# EAGLE board DemoBoard (EAGLE 9.6.2)

Size 166.04 x 80 mm. Coordinates in mm from the lower left corner, seen from the top.
Outline: 0,0 166.04,0 166.04,80 0,80 0,0
Copper layers (1*16): Top 0.035mm / dielectric 1.5mm / Bottom 0.035mm
Design rules "default": minimum track width 6mil, minimum drill 0.35mm, track to track 6mil, track to pad 6mil, pad to pad 6mil, via to via 6mil, smd to smd 6mil, copper to edge 40mil, drill to drill 6mil, minimum pad ring 10mil, minimum via ring 8mil, stop-mask expansion 4mil, vias tented up to drill 0mil, thermal gap 10mil

## Footprints (pad centres in the part's own frame; a part is rotated, then mirrored left to right if it is on the bottom)
C0805 = smd 1.3 x 1.5: 1 -0.85,0; 2 0.85,0
LED_IN-P55TATRGB = smd 2 x 1.4: 1 -2.2,1.8; 3 -2.2,-1.8; 4 2.2,-1.8; 6 2.2,1.8 | smd 2 x 1: 2 -2.2,0; 5 2.2,0
16026-16X2 = drill 3 pad 6: MNT1 2.5,-2.5; MNT2 77.5,-2.4; MNT3 2.5,-33.5; MNT4 77.5,-33.5 | drill 1 offset: P$1 8,-2.3; P$2 10.54,-2.3; P$3 13.08,-2.3; P$4 15.62,-2.3; P$5 18.16,-2.3; P$6 20.7,-2.3; P$7 23.24,-2.3; P$8 25.78,-2.3; P$9 28.32,-2.3; P$10 30.86,-2.3; P$11 33.4,-2.3; P$12 35.94,-2.3; P$13 38.48,-2.3; P$14 41.02,-2.3; P$15 43.56,-2.3; P$16 46.1,-2.3
SAMTEC-MMS-105-02-X-SV = smd 1.016 x 2.085: 1 -4,-1.677; 2 -2,1.677; 3 0,-1.677; 4 2,1.677; 5 4,-1.677
FRAMATOME_10104111-0001LF = smd 0.4 x 1.4: 1 -1.3,2.85; 2 -0.65,2.85; 3 0,2.85; 4 0.65,2.85; 5 1.3,2.85 | smd 2.3 x 1.9: 6 -3.75,0; 9 3.75,0 | smd 1.8 x 1.9: 7 -1.15,0; 8 1.15,0
0204V = drill 0.813 octagon: 1 -1.27,0; 2 1.27,0
R0805 = smd 1.3 x 1.5: 1 -0.95,0; 2 0.95,0
SW_1571983-4 = smd 0.76 x 1.27: 1 -1.905,-3.81; 1-1 -1.905,3.81; 2 -0.635,-3.81; 2-1 -0.635,3.81; 3 0.635,-3.81; 3-1 0.635,3.81; 4 1.905,-3.81; 4-1 1.905,3.81
BGA8C50P2X4_190X90X50 = smd 0.229 x 0.229: A1 -0.254,0.762; A2 0.254,0.762; B1 -0.254,0.254; B2 0.254,0.254; C1 -0.254,-0.254; C2 0.254,-0.254; D1 -0.254,-0.762; D2 0.254,-0.762
QFP50P2200X2200X160-144N = smd 1.56 x 0.28: 1 -10.68,8.75; 2 -10.68,8.25; 3 -10.68,7.75; 4 -10.68,7.25; 5 -10.68,6.75; 6 -10.68,6.25; 7 -10.68,5.75; 8 -10.68,5.25; 9 -10.68,4.75; 10 -10.68,4.25; 11 -10.68,3.75; 12 -10.68,3.25; 13 -10.68,2.75; 14 -10.68,2.25; 15 -10.68,1.75; 16 -10.68,1.25; 17 -10.68,0.75; 18 -10.68,0.25; 19 -10.68,-0.25; 20 -10.68,-0.75; 21 -10.68,-1.25; 22 -10.68,-1.75; 23 -10.68,-2.25; 24 -10.68,-2.75; 25 -10.68,-3.25; 26 -10.68,-3.75; 27 -10.68,-4.25; 28 -10.68,-4.75; 29 -10.68,-5.25; 30 -10.68,-5.75; 31 -10.68,-6.25; 32 -10.68,-6.75; 33 -10.68,-7.25; 34 -10.68,-7.75; 35 -10.68,-8.25; 36 -10.68,-8.75; 73 10.68,-8.75; 74 10.68,-8.25; 75 10.68,-7.75; 76 10.68,-7.25; 77 10.68,-6.75; 78 10.68,-6.25; 79 10.68,-5.75; 80 10.68,-5.25; 81 10.68,-4.75; 82 10.68,-4.25; 83 10.68,-3.75; 84 10.68,-3.25; 85 10.68,-2.75; 86 10.68,-2.25; 87 10.68,-1.75; 88 10.68,-1.25; 89 10.68,-0.75; 90 10.68,-0.25; 91 10.68,0.25; 92 10.68,0.75; 93 10.68,1.25; 94 10.68,1.75; 95 10.68,2.25; 96 10.68,2.75; 97 10.68,3.25; 98 10.68,3.75; 99 10.68,4.25; 100 10.68,4.75; 101 10.68,5.25; 102 10.68,5.75; 103 10.68,6.25; 104 10.68,6.75; 105 10.68,7.25; 106 10.68,7.75; 107 10.68,8.25; 108 10.68,8.75 | smd 0.28 x 1.56: 37 -8.75,-10.68; 38 -8.25,-10.68; 39 -7.75,-10.68; 40 -7.25,-10.68; 41 -6.75,-10.68; 42 -6.25,-10.68; 43 -5.75,-10.68; 44 -5.25,-10.68; 45 -4.75,-10.68; 46 -4.25,-10.68; 47 -3.75,-10.68; 48 -3.25,-10.68; 49 -2.75,-10.68; 50 -2.25,-10.68; 51 -1.75,-10.68; 52 -1.25,-10.68; 53 -0.75,-10.68; 54 -0.25,-10.68; 55 0.25,-10.68; 56 0.75,-10.68; 57 1.25,-10.68; 58 1.75,-10.68; 59 2.25,-10.68; 60 2.75,-10.68; 61 3.25,-10.68; 62 3.75,-10.68; 63 4.25,-10.68; 64 4.75,-10.68; 65 5.25,-10.68; 66 5.75,-10.68; 67 6.25,-10.68; 68 6.75,-10.68; 69 7.25,-10.68; 70 7.75,-10.68; 71 8.25,-10.68; 72 8.75,-10.68; 109 8.75,10.68; 110 8.25,10.68; 111 7.75,10.68; 112 7.25,10.68; 113 6.75,10.68; 114 6.25,10.68; 115 5.75,10.68; 116 5.25,10.68; 117 4.75,10.68; 118 4.25,10.68; 119 3.75,10.68; 120 3.25,10.68; 121 2.75,10.68; 122 2.25,10.68; 123 1.75,10.68; 124 1.25,10.68; 125 0.75,10.68; 126 0.25,10.68; 127 -0.25,10.68; 128 -0.75,10.68; 129 -1.25,10.68; 130 -1.75,10.68; 131 -2.25,10.68; 132 -2.75,10.68; 133 -3.25,10.68; 134 -3.75,10.68; 135 -4.25,10.68; 136 -4.75,10.68; 137 -5.25,10.68; 138 -5.75,10.68; 139 -6.25,10.68; 140 -6.75,10.68; 141 -7.25,10.68; 142 -7.75,10.68; 143 -8.25,10.68; 144 -8.75,10.68
SOP65P640X120-17T330L = smd 1.272 x 0.582: 1 -2.822,2.275; 2 -2.822,1.625; 3 -2.822,0.975; 4 -2.822,0.325; 5 -2.822,-0.325; 6 -2.822,-0.975; 7 -2.822,-1.625; 8 -2.822,-2.275; 9 2.822,-2.275; 10 2.822,-1.625; 11 2.822,-0.975; 12 2.822,-0.325; 13 2.822,0.325; 14 2.822,0.975; 15 2.822,1.625; 16 2.822,2.275 | smd 3.3 x 3.3: 17 0,0
BGA484C100P22X22_2400X2400X220N = smd 0.5 x 0.5: A1 -10.5,10.5; A2 -9.5,10.5; A3 -8.5,10.5; A4 -7.5,10.5; A5 -6.5,10.5; A6 -5.5,10.5; A7 -4.5,10.5; A8 -3.5,10.5; A9 -2.5,10.5; A10 -1.5,10.5; A11 -0.5,10.5; A12 0.5,10.5; A13 1.5,10.5; A14 2.5,10.5; A15 3.5,10.5; A16 4.5,10.5; A17 5.5,10.5; A18 6.5,10.5; A19 7.5,10.5; A20 8.5,10.5; A21 9.5,10.5; A22 10.5,10.5; AA1 -10.5,-9.5; AA2 -9.5,-9.5; AA3 -8.5,-9.5; AA4 -7.5,-9.5; AA5 -6.5,-9.5; AA6 -5.5,-9.5; AA7 -4.5,-9.5; AA8 -3.5,-9.5; AA9 -2.5,-9.5; AA10 -1.5,-9.5; AA11 -0.5,-9.5; AA12 0.5,-9.5; AA13 1.5,-9.5; AA14 2.5,-9.5; AA15 3.5,-9.5; AA16 4.5,-9.5; AA17 5.5,-9.5; AA18 6.5,-9.5; AA19 7.5,-9.5; AA20 8.5,-9.5; AA21 9.5,-9.5; AA22 10.5,-9.5; AB1 -10.5,-10.5; AB2 -9.5,-10.5; AB3 -8.5,-10.5; AB4 -7.5,-10.5; AB5 -6.5,-10.5; AB6 -5.5,-10.5; AB7 -4.5,-10.5; AB8 -3.5,-10.5; AB9 -2.5,-10.5; AB10 -1.5,-10.5; AB11 -0.5,-10.5; AB12 0.5,-10.5; AB13 1.5,-10.5; AB14 2.5,-10.5; AB15 3.5,-10.5; AB16 4.5,-10.5; AB17 5.5,-10.5; AB18 6.5,-10.5; AB19 7.5,-10.5; AB20 8.5,-10.5; AB21 9.5,-10.5; AB22 10.5,-10.5; B1 -10.5,9.5; B2 -9.5,9.5; B3 -8.5,9.5; B4 -7.5,9.5; B5 -6.5,9.5; B6 -5.5,9.5; B7 -4.5,9.5; B8 -3.5,9.5; B9 -2.5,9.5; B10 -1.5,9.5; B11 -0.5,9.5; B12 0.5,9.5; B13 1.5,9.5; B14 2.5,9.5; B15 3.5,9.5; B16 4.5,9.5; B17 5.5,9.5; B18 6.5,9.5; B19 7.5,9.5; B20 8.5,9.5; B21 9.5,9.5; B22 10.5,9.5; C1 -10.5,8.5; C2 -9.5,8.5; C3 -8.5,8.5; C4 -7.5,8.5; C5 -6.5,8.5; C6 -5.5,8.5; C7 -4.5,8.5; C8 -3.5,8.5; C9 -2.5,8.5; C10 -1.5,8.5; C11 -0.5,8.5; C12 0.5,8.5; C13 1.5,8.5; C14 2.5,8.5; C15 3.5,8.5; C16 4.5,8.5; C17 5.5,8.5; C18 6.5,8.5; C19 7.5,8.5; C20 8.5,8.5; C21 9.5,8.5; C22 10.5,8.5; D1 -10.5,7.5; D2 -9.5,7.5; D3 -8.5,7.5; D4 -7.5,7.5; D5 -6.5,7.5; D6 -5.5,7.5; D7 -4.5,7.5; D8 -3.5,7.5; D9 -2.5,7.5; D10 -1.5,7.5; D11 -0.5,7.5; D12 0.5,7.5; D13 1.5,7.5; D14 2.5,7.5; D15 3.5,7.5; D16 4.5,7.5; D17 5.5,7.5; D18 6.5,7.5; D19 7.5,7.5; D20 8.5,7.5; D21 9.5,7.5; D22 10.5,7.5; E1 -10.5,6.5; E2 -9.5,6.5; E3 -8.5,6.5; E4 -7.5,6.5; E5 -6.5,6.5; E6 -5.5,6.5; E7 -4.5,6.5; E8 -3.5,6.5; E9 -2.5,6.5; E10 -1.5,6.5; E11 -0.5,6.5; E12 0.5,6.5; E13 1.5,6.5; E14 2.5,6.5; E15 3.5,6.5; E16 4.5,6.5; E17 5.5,6.5; E18 6.5,6.5; E19 7.5,6.5; E20 8.5,6.5; E21 9.5,6.5; E22 10.5,6.5; F1 -10.5,5.5; F2 -9.5,5.5; F3 -8.5,5.5; F4 -7.5,5.5; F5 -6.5,5.5; F6 -5.5,5.5; F7 -4.5,5.5; F8 -3.5,5.5; F9 -2.5,5.5; F10 -1.5,5.5; F11 -0.5,5.5; F12 0.5,5.5; F13 1.5,5.5; F14 2.5,5.5; F15 3.5,5.5; F16 4.5,5.5; F17 5.5,5.5; F18 6.5,5.5; F19 7.5,5.5; F20 8.5,5.5; F21 9.5,5.5; F22 10.5,5.5; G1 -10.5,4.5; G2 -9.5,4.5; G3 -8.5,4.5; G4 -7.5,4.5; G5 -6.5,4.5; G6 -5.5,4.5; G7 -4.5,4.5; G8 -3.5,4.5; G9 -2.5,4.5; G10 -1.5,4.5; G11 -0.5,4.5; G12 0.5,4.5; G13 1.5,4.5; G14 2.5,4.5; G15 3.5,4.5; G16 4.5,4.5; G17 5.5,4.5; G18 6.5,4.5; G19 7.5,4.5; G20 8.5,4.5; G21 9.5,4.5; G22 10.5,4.5; H1 -10.5,3.5; H2 -9.5,3.5; H3 -8.5,3.5; H4 -7.5,3.5; H5 -6.5,3.5; H6 -5.5,3.5; H7 -4.5,3.5; H8 -3.5,3.5; H9 -2.5,3.5; H10 -1.5,3.5; H11 -0.5,3.5; H12 0.5,3.5; H13 1.5,3.5; H14 2.5,3.5; H15 3.5,3.5; H16 4.5,3.5; H17 5.5,3.5; H18 6.5,3.5; H19 7.5,3.5; H20 8.5,3.5; H21 9.5,3.5; H22 10.5,3.5; J1 -10.5,2.5; J2 -9.5,2.5; J3 -8.5,2.5; J4 -7.5,2.5; J5 -6.5,2.5; J6 -5.5,2.5; J7 -4.5,2.5; J8 -3.5,2.5; J9 -2.5,2.5; J10 -1.5,2.5; J11 -0.5,2.5; J12 0.5,2.5; J13 1.5,2.5; J14 2.5,2.5; J15 3.5,2.5; J16 4.5,2.5; J17 5.5,2.5; J18 6.5,2.5; J19 7.5,2.5; J20 8.5,2.5; J21 9.5,2.5; J22 10.5,2.5; K1 -10.5,1.5; K2 -9.5,1.5; K3 -8.5,1.5; K4 -7.5,1.5; K5 -6.5,1.5; K6 -5.5,1.5; K7 -4.5,1.5; K8 -3.5,1.5; K9 -2.5,1.5; K10 -1.5,1.5; K11 -0.5,1.5; K12 0.5,1.5; K13 1.5,1.5; K14 2.5,1.5; K15 3.5,1.5; K16 4.5,1.5; K17 5.5,1.5; K18 6.5,1.5; K19 7.5,1.5; K20 8.5,1.5; K21 9.5,1.5; K22 10.5,1.5; L1 -10.5,0.5; L2 -9.5,0.5; L3 -8.5,0.5; L4 -7.5,0.5; L5 -6.5,0.5; L6 -5.5,0.5; L7 -4.5,0.5; L8 -3.5,0.5; L9 -2.5,0.5; L10 -1.5,0.5; L11 -0.5,0.5; L12 0.5,0.5; L13 1.5,0.5; L14 2.5,0.5; L15 3.5,0.5; L16 4.5,0.5; L17 5.5,0.5; L18 6.5,0.5; L19 7.5,0.5; L20 8.5,0.5; L21 9.5,0.5; L22 10.5,0.5; M1 -10.5,-0.5; M2 -9.5,-0.5; M3 -8.5,-0.5; M4 -7.5,-0.5; M5 -6.5,-0.5; M6 -5.5,-0.5; M7 -4.5,-0.5; M8 -3.5,-0.5; M9 -2.5,-0.5; M10 -1.5,-0.5; M11 -0.5,-0.5; M12 0.5,-0.5; M13 1.5,-0.5; M14 2.5,-0.5; M15 3.5,-0.5; M16 4.5,-0.5; M17 5.5,-0.5; M18 6.5,-0.5; M19 7.5,-0.5; M20 8.5,-0.5; M21 9.5,-0.5; M22 10.5,-0.5; N1 -10.5,-1.5; N2 -9.5,-1.5; N3 -8.5,-1.5; N4 -7.5,-1.5; N5 -6.5,-1.5; N6 -5.5,-1.5; N7 -4.5,-1.5; N8 -3.5,-1.5; N9 -2.5,-1.5; N10 -1.5,-1.5; N11 -0.5,-1.5; N12 0.5,-1.5; N13 1.5,-1.5; N14 2.5,-1.5; N15 3.5,-1.5; N16 4.5,-1.5; N17 5.5,-1.5; N18 6.5,-1.5; N19 7.5,-1.5; N20 8.5,-1.5; N21 9.5,-1.5; N22 10.5,-1.5; P1 -10.5,-2.5; P2 -9.5,-2.5; P3 -8.5,-2.5; P4 -7.5,-2.5; P5 -6.5,-2.5; P6 -5.5,-2.5; P7 -4.5,-2.5; P8 -3.5,-2.5; P9 -2.5,-2.5; P10 -1.5,-2.5; P11 -0.5,-2.5; P12 0.5,-2.5; P13 1.5,-2.5; P14 2.5,-2.5; P15 3.5,-2.5; P16 4.5,-2.5; P17 5.5,-2.5; P18 6.5,-2.5; P19 7.5,-2.5; P20 8.5,-2.5; P21 9.5,-2.5; P22 10.5,-2.5; R1 -10.5,-3.5; R2 -9.5,-3.5; R3 -8.5,-3.5; R4 -7.5,-3.5; R5 -6.5,-3.5; R6 -5.5,-3.5; R7 -4.5,-3.5; R8 -3.5,-3.5; R9 -2.5,-3.5; R10 -1.5,-3.5; R11 -0.5,-3.5; R12 0.5,-3.5; R13 1.5,-3.5; R14 2.5,-3.5; R15 3.5,-3.5; R16 4.5,-3.5; R17 5.5,-3.5; R18 6.5,-3.5; R19 7.5,-3.5; R20 8.5,-3.5; R21 9.5,-3.5; R22 10.5,-3.5; T1 -10.5,-4.5; T2 -9.5,-4.5; T3 -8.5,-4.5; T4 -7.5,-4.5; T5 -6.5,-4.5; T6 -5.5,-4.5; T7 -4.5,-4.5; T8 -3.5,-4.5; T9 -2.5,-4.5; T10 -1.5,-4.5; T11 -0.5,-4.5; T12 0.5,-4.5; T13 1.5,-4.5; T14 2.5,-4.5; T15 3.5,-4.5; T16 4.5,-4.5; T17 5.5,-4.5; T18 6.5,-4.5; T19 7.5,-4.5; T20 8.5,-4.5; T21 9.5,-4.5; T22 10.5,-4.5; U1 -10.5,-5.5; U2 -9.5,-5.5; U3 -8.5,-5.5; U4 -7.5,-5.5; U5 -6.5,-5.5; U6 -5.5,-5.5; U7 -4.5,-5.5; U8 -3.5,-5.5; U9 -2.5,-5.5; U10 -1.5,-5.5; U11 -0.5,-5.5; U12 0.5,-5.5; U13 1.5,-5.5; U14 2.5,-5.5; U15 3.5,-5.5; U16 4.5,-5.5; U17 5.5,-5.5; U18 6.5,-5.5; U19 7.5,-5.5; U20 8.5,-5.5; U21 9.5,-5.5; U22 10.5,-5.5; V1 -10.5,-6.5; V2 -9.5,-6.5; V3 -8.5,-6.5; V4 -7.5,-6.5; V5 -6.5,-6.5; V6 -5.5,-6.5; V7 -4.5,-6.5; V8 -3.5,-6.5; V9 -2.5,-6.5; V10 -1.5,-6.5; V11 -0.5,-6.5; V12 0.5,-6.5; V13 1.5,-6.5; V14 2.5,-6.5; V15 3.5,-6.5; V16 4.5,-6.5; V17 5.5,-6.5; V18 6.5,-6.5; V19 7.5,-6.5; V20 8.5,-6.5; V21 9.5,-6.5; V22 10.5,-6.5; W1 -10.5,-7.5; W2 -9.5,-7.5; W3 -8.5,-7.5; W4 -7.5,-7.5; W5 -6.5,-7.5; W6 -5.5,-7.5; W7 -4.5,-7.5; W8 -3.5,-7.5; W9 -2.5,-7.5; W10 -1.5,-7.5; W11 -0.5,-7.5; W12 0.5,-7.5; W13 1.5,-7.5; W14 2.5,-7.5; W15 3.5,-7.5; W16 4.5,-7.5; W17 5.5,-7.5; W18 6.5,-7.5; W19 7.5,-7.5; W20 8.5,-7.5; W21 9.5,-7.5; W22 10.5,-7.5; Y1 -10.5,-8.5; Y2 -9.5,-8.5; Y3 -8.5,-8.5; Y4 -7.5,-8.5; Y5 -6.5,-8.5; Y6 -5.5,-8.5; Y7 -4.5,-8.5; Y8 -3.5,-8.5; Y9 -2.5,-8.5; Y10 -1.5,-8.5; Y11 -0.5,-8.5; Y12 0.5,-8.5; Y13 1.5,-8.5; Y14 2.5,-8.5; Y15 3.5,-8.5; Y16 4.5,-8.5; Y17 5.5,-8.5; Y18 6.5,-8.5; Y19 7.5,-8.5; Y20 8.5,-8.5; Y21 9.5,-8.5; Y22 10.5,-8.5
OSCDFN320X250X80-4N = smd 1.01 x 0.81: 1 -1.05,-0.8; 2 1.05,-0.8; 3 1.05,0.8; 4 -1.05,0.8

## Placement (x,y rotation side)
C_C1  3.3nF  [C0805]  17.78,73.66 0 top
C_C2  3.3nF  [C0805]  11.43,73.66 0 top
C_F  100nF  [C0805]  53.34,73.66 0 top
C_F1  100nF  [C0805]  45.72,73.66 0 top
C_IN  100uF  [C0805]  38.1,73.66 0 top
C_IN1  100uF  [C0805]  30.48,73.66 0 top
C_OUT  100uF  [C0805]  -17.78,67.31 0 top  (outside the outline)
C_OUT1  100uF  [C0805]  26.67,67.31 0 top
C_SS  33nF  [C0805]  24.13,73.66 0 top
C_SS1  33nF  [C0805]  60.96,73.66 0 top
C_VCC  1uF  [C0805]  68.58,73.66 0 top
C_VCC1  1uF  [C0805]  17.78,67.31 0 top
C_VCC2  1uF  [C0805]  8.89,67.31 0 top
C_VCC3  1uF  [C0805]  0,67.31 0 top
C_VCC4  1uF  [C0805]  -8.89,67.31 0 top  (outside the outline)
D1  IN-P55TATRGB  [LED_IN-P55TATRGB]  8.89,40.64 0 top
DIS1  HD44780_16026_16X2_BYG_5V  [16026-16X2]  157.48,40.64 180 top
J1  SAMTEC-MMS-105-02-X-SVJ  [SAMTEC-MMS-105-02-X-SV]  29.21,44.45 0 top
J4  10104111-0001LF  [FRAMATOME_10104111-0001LF]  -71.12,43.18 0 top  (outside the outline)
L  1.5uH  [0204V]  43.18,67.31 0 top
L1  1.5uH  [0204V]  36.83,67.31 0 top
R_C1  3.16K  [R0805]  69.85,67.31 0 top
R_C2  3.16K  [R0805]  62.23,67.31 0 top
R_F  1  [R0805]  49.53,67.31 0 top
R_F1  1  [R0805]  55.88,67.31 0 top
R_FB1  12.7k  [R0805]  0,60.96 0 top
R_FB2  10.2k  [R0805]  -7.62,60.96 0 top  (outside the outline)
R_OSC1  1k  [R0805]  2.54,52.07 0 top
R_OSC2  1k  [R0805]  -7.62,52.07 0 top  (outside the outline)
R_OSC3  1k  [R0805]  -17.78,52.07 0 top  (outside the outline)
R_OSC4  280  [R0805]  67.31,60.96 0 top
R_OSC5  220  [R0805]  57.15,60.96 0 top
R_OSC6  280  [R0805]  46.99,60.96 0 top
R_OSC7  220  [R0805]  36.83,60.96 0 top
R_OSC8  220  [R0805]  26.67,60.96 0 top
R_OSC9  220  [R0805]  16.51,60.96 0 top
R_OSC10  220  [R0805]  12.7,52.07 0 top
R_PG  10K  [R0805]  -15.24,60.96 0 top  (outside the outline)
R_PG1  10K  [R0805]  7.62,60.96 0 top
S1  1571983-4  [SW_1571983-4]  -83.82,46.99 0 top  (outside the outline)
U1  SN74LVC2T45YZPR  [BGA8C50P2X4_190X90X50]  -38.1,73.66 0 top  (outside the outline)
U2  STM32F207ZGT6  [QFP50P2200X2200X160-144N]  -25.4,54.61 0 top  (outside the outline)
U3  SN74LVC2T45YZPR  [BGA8C50P2X4_190X90X50]  -67.31,73.66 0 top  (outside the outline)
U4  SN74LVC2T45YZPR  [BGA8C50P2X4_190X90X50]  57.15,38.1 90 top
U$1  LM20125/LM20125Q  [SOP65P640X120-17T330L]  64.77,41.91 0 top
U$2  BGA352  [BGA484C100P22X22_2400X2400X220N]  63.5,17.78 180 top
U$3  LM20125/LM20125Q  [SOP65P640X120-17T330L]  45.72,41.91 0 top
Y1  SIT1602BI-23-18E-33.333300G  [OSCDFN320X250X80-4N]  -20.32,40.64 0 top  (outside the outline)
Y2  SIT1602BI-23-18E-33.333300G  [OSCDFN320X250X80-4N]  50.8,53.34 0 top
Y3  SIT1602BI-23-18E-33.333300G  [OSCDFN320X250X80-4N]  24.13,53.34 0 top

## Library data of the parts
C_C1 C_C2 C_F C_F1 C_IN C_IN1 C_OUT C_OUT1 C_SS C_SS1 C_VCC C_VCC1-C_VCC4 = adafruit
D1 = IN-P55TATRGB; AVAILABILITY: Warning; DESCRIPTION: Red, Green, Blue (RGB) 624nm Red, 520nm Green, 468nm Blue LED Indication - Discrete 2V Red, 3.2V Green, 3.2V Blue 6-SMD, J-Lead; MF: Inolux; MOUSER-PURCHASE-URL: https://snapeda.com/shop?store=Mouser&id=3600412; MP: IN-P55TATRGB; PACKAGE: SMD-6 Inolux; PRICE: None
DIS1 = HD44780; AVAILABILITY: Unavailable; DESCRIPTION: Character LCD Display Module Transflective 5 x 8 Dots STN - Super-Twisted Nematic LED - White Parallel 98.00mm x 60.00mm x 11.60mm; MF: Lumex Opto/Components; MP: HD44780; PACKAGE: None; PRICE: None
J1 = connector5pin; AVAILABILITY: Bad; DESCRIPTION: 5 Position Receptacle Connector Surface Mount; MF: Samtec; MP: MMS-105-02-L-SV-K; PACKAGE: None; PRICE: None
J4 = microUSBAB; ARROW_ELECTRONICS-PURCHASE-URL: https://snapeda.com/shop?store=Arrow+Electronics&id=2753161; AVAILABILITY: Good; DESCRIPTION: USB - micro AB USB 2.0 Receptacle Connector 5 Position Surface Mount, Right Angle; DIGIKEY-PURCHASE-URL: https://snapeda.com/shop?store=DigiKey&id=2753161; MF: Amphenol ICC; MOUSER-PURCHASE-URL: https://snapeda.com/shop?store=Mouser&id=2753161; MP: 10104111-0001LF; PACKAGE: None; PRICE: None
L L1 = rcl; SPICEPREFIX: L
R_C1 R_C2 R_F R_F1 R_FB1 R_FB2 R_OSC1-R_OSC10 R_PG R_PG1 = rcl; SPICEPREFIX: R
S1 = 1571983-4; ARROW_ELECTRONICS-PURCHASE-URL: https://snapeda.com/shop?store=Arrow+Electronics&id=2889756; AVAILABILITY: Good; COMMENT: 1571983-4; DESCRIPTION: Dip Switch SPST 4 Position Surface Mount Slide (Standard) Actuator 25mA 24VDC; DIGIKEY-PURCHASE-URL: https://snapeda.com/shop?store=DigiKey&id=2889756; MF: TE Connectivity; MP: 1571983-4; PACKAGE: None; PRICE: None
U1 U3 U4 = SN74LVC2T45YZPR; AVAILABILITY: Warning; DESCRIPTION: 2-Bit Dual Supply Transceiver with Configurable Voltage-Level Shifting and 3-State Outputs 8-DSBGA -40 to 85; MF: Texas Instruments; MOUSER-PURCHASE-URL: https://snapeda.com/shop?store=Mouser&id=317071; MP: SN74LVC2T45YZPR; PACKAGE: DSBGA-8 Texas Instruments; PRICE: None; TEXAS_INSTRUMENTS-PURCHASE-URL: https://snapeda.com/shop?store=Texas+Instruments&id=317071
U2 = STM32F207ZGT6; AVAILABILITY: Good; DESCRIPTION: ARM® Cortex®-M3 STM32F2 Microcontroller IC 32-Bit 120MHz 1MB (1M x 8) FLASH 144-LQFP (20x20); DIGIKEY-PURCHASE-URL: https://snapeda.com/shop?store=DigiKey&id=459075; MF: STMicroelectronics; MOUSER-PURCHASE-URL: https://snapeda.com/shop?store=Mouser&id=459075; MP: STM32F207ZGT6; PACKAGE: LQFP-144 STMicroelectronics; PRICE: None
U$1 U$3 = LM20125
U$2 = BGA352
Y1-Y3 = SIT1602BI-23-18E-33.333300G; AVAILABILITY: Unavailable; DESCRIPTION: 33.3333MHz XO (Standard) HCMOS, LVCMOS Oscillator 1.8V Enable/Disable 4-SMD, No Lead; MF: SiTIME; MP: SIT1602BI-23-18E-33.333300G; PACKAGE: SMD-4 SiTime; PRICE: None

## Nets
5V_EXT: C_IN1.1 C_IN.1 R_F1.2 R_F.2 R_PG1.2 R_PG.2 U$1.6 U$1.7 U$1.12 U$3.6 U$3.7
CCFFHEAD: U$2.U2
CCFFTAIL: U$2.H22
CCSPYPAD0: U$2.P2
CCSPYPAD1: U$2.A10
CCSPYPAD2: U$2.R3
CLK: J1.4 U$2.B6
COUTSPYDPAD0: U$2.U1
DB4: DIS1.P$11
DB5: DIS1.P$12
DB6: DIS1.P$13
DB7: DIS1.P$14 U4.B1
E: DIS1.P$6
GND: C_C1.2 C_C2.2 C_F1.2 C_F.2 C_IN1.2 C_IN.2 C_OUT1.2 C_OUT.2 C_SS1.2 C_SS.2 C_VCC1.2 C_VCC2.2 C_VCC3.2 C_VCC4.2 C_VCC.2 DIS1.P$1 DIS1.P$16 J4.5 R_FB2.2 U1.D1 U1.D2 U3.D1 U3.D2 U4.D1 U4.D2 U$1.5 U$1.10 U$1.11 U$1.15 U$1.16 U$1.17 U$2.A1 U$2.A4 U$2.A9 U$2.A12 U$2.A15 U$2.A19 U$2.A22 U$2.AA3 U$2.AA10 U$2.AA13 U$2.AA20 U$2.AB1 U$2.AB4 U$2.AB7 U$2.AB10 U$2.AB13 U$2.AB16 U$2.AB19 U$2.AB22 U$2.B3 U$2.B10 U$2.B11 U$2.B13 U$2.B14 U$2.C2 U$2.C3 U$2.C13 U$2.C14 U$2.C20 U$2.C21 U$2.D1 U$2.D3 U$2.D6 U$2.D9 U$2.D10 U$2.D14 U$2.D17 U$2.D18 U$2.D21 U$2.D22 U$2.E4 U$2.F4 U$2.F19 U$2.G1 U$2.G4 U$2.G19 U$2.G22 U$2.H8 U$2.H15 U$2.J4 U$2.J9 U$2.J10 U$2.J11 U$2.J12 U$2.J13 U$2.J14 U$2.K1 U$2.K4 U$2.K9 U$2.K10 U$2.K11 U$2.K12 U$2.K13 U$2.K14 U$2.K19 U$2.K22 U$2.L2 U$2.L4 U$2.L9 U$2.L10 U$2.L11 U$2.L12 U$2.L13 U$2.L14 U$2.L21 U$2.M2 U$2.M9 U$2.M10 U$2.M11 U$2.M12 U$2.M13 U$2.M14 U$2.M20 U$2.M21 U$2.N1 U$2.N4 U$2.N9 U$2.N10 U$2.N11 U$2.N12 U$2.N13 U$2.N14 U$2.N19 U$2.N22 U$2.P9 U$2.P10 U$2.P11 U$2.P12 U$2.P13 U$2.P14 U$2.R2 U$2.R8 U$2.R15 U$2.T1 U$2.T2 U$2.T19 U$2.T22 U$2.U4 U$2.U19 U$2.V4 U$2.V19 U$2.W1 U$2.W2 U$2.W6 U$2.W7 U$2.W10 U$2.W13 U$2.W16 U$2.W17 U$2.W22 U$2.Y2 U$2.Y3 U$2.Y10 U$2.Y13 U$2.Y20 U$3.5 U$3.10 U$3.11 U$3.15 U$3.16 U$3.17 Y1.2 Y2.2 Y3.2
GPIO0: U$2.A8
GPIO1: U$2.C10
GPIO2: U$2.C9
GPIO3: U$2.A6
GPIO4: U$2.B7
GPIO5: U$2.C7
GPIO6: U$2.N3
GPIO7: U$2.P1
GPIO8: R_OSC5.2 U$2.M3
GPIO9: R_OSC4.2 U$2.M4
GPIO10: R_OSC6.2 U$2.M1
GPIO11: U$2.L1
GPIO12: U4.B2 U$2.Y18
GPIO13: U$2.AA19
GPIO14: U$2.AA18
GPIO15: U$2.AA17
GPIO16: U$2.AA16
GPIO17: U$2.AB17
GPIO18: U$2.M19
GPIO19: U$2.M22
GPIO20: J1.1 U$2.L22
GPIO21: J1.2 U$2.L19
GPIO22: J1.3 U$2.L20
GPIO23: U$2.J21
LUT4OUT0: U$2.E22
LUT4OUT1: U$2.F21
LUT4OUT2: U$2.F22
LUT4OUT3: U$2.G21
LUT5OUT0: U$2.B4
LUT5OUT1: U$2.A5
LUT6OUT0: U$2.C12
N$1: R_C2.2 U$3.4
N$2: C_SS.1 U$1.1
N$3: R_C1.2 U$1.4
N$4: C_C1.1 R_C1.1
N$5: C_VCC.1 U$1.13
N$6: C_C2.1 R_C2.1
N$7: L.2 U$1.8 U$1.9
N$8: C_VCC1.1 U$3.13
N$9: C_SS1.1 U$3.1
N$10: L1.2 U$3.8 U$3.9
N$11: C_F1.1 R_F1.1 U$3.14
N$12: C_F.1 R_F.1 U$1.14
N$13: S1.2 Y1.3
N$14: C_VCC2.1 R_OSC1.2 Y1.4
N$15: R_OSC1.1 Y1.1
N$16: S1.3 Y2.3
N$17: R_OSC2.2 Y2.4
N$18: R_OSC2.1 Y2.1
N$19: S1.4 Y3.3
N$20: R_OSC3.2 Y3.4
N$21: R_OSC3.1 Y3.1
N$22: S1.2-1 S1.3-1 S1.4-1
N$23: C_VCC3.1
N$24: C_VCC4.1
N$25: R_OSC7.1
N$26: R_OSC8.1
N$27: R_OSC9.1
N$28: R_OSC10.1
N$29: DIS1.P$2
N$30: D1.1 R_OSC4.1
N$31: D1.2 R_OSC5.1
N$32: D1.3 R_OSC6.1
N$33: U3.B1
N$36: J1.5
N$41: U1.B1
N$42: U1.C1
N$43: U1.B2
N$44: U1.C2
N$45: U3.C1
N$46: U3.B2
N$47: U3.C2
N$49: U4.C1
N$51: U4.C2
PERFSPYPAD0: U$2.A11
PG_CORE: R_PG.1 U$1.3 U$3.12
PG_IO: R_PG1.1 U$3.3
PRESET: U$2.Y14
PROGCLK: U$2.AB14
RESET: U$2.B5
RS: DIS1.P$4
RW: DIS1.P$5
S: J4.6 J4.7 J4.8 J4.9
SCHEAD: U$2.H20
SCSPYPAD0: U$2.V3
SCTAIL: U$2.T3
SHIFTREGSPY0: U$2.V2
TESTEN: U$2.D11
V5: DIS1.P$15
VBAT: U2.6
VBUS: J4.1
VCAP_1: U2.71
VCAP_2: U2.106
VCC1: R_OSC8.2
VCC2: R_OSC9.2
VCC33: D1.4 D1.6 R_OSC7.2 R_OSC10.2
VCCA: U1.A1 U3.A1 U4.A1
VCCB: U1.A2 U3.A2 U4.A2
VDD: U2.17 U2.30 U2.39 U2.52 U2.62 U2.72 U2.84 U2.95 U2.108 U2.121 U2.131 U2.144
VDD_CORE: C_OUT.1 L.1 R_FB1.2 R_FB2.1 U$1.2 U$2.C8 U$2.D4 U$2.D5 U$2.D7 U$2.D8 U$2.D15 U$2.D16 U$2.D19 U$2.E19 U$2.H9 U$2.H10 U$2.H11 U$2.H12 U$2.H13 U$2.H14 U$2.J8 U$2.J15 U$2.K8 U$2.K15 U$2.L8 U$2.L15 U$2.M8 U$2.M15 U$2.N8 U$2.N15 U$2.P8 U$2.P15 U$2.R9 U$2.R10 U$2.R11 U$2.R12 U$2.R13 U$2.R14 U$2.W4 U$2.W5 U$2.W8 U$2.W15 U$2.W18 U$2.W19 U$3.2
VDD_IO: C_OUT1.1 D1.5 L1.1 R_FB1.1 U$2.AA2 U$2.AA9 U$2.AA14 U$2.AA21 U$2.AB5 U$2.AB18 U$2.B2 U$2.B9 U$2.B12 U$2.B15 U$2.B20 U$2.B21 U$2.C4 U$2.C6 U$2.C11 U$2.C17 U$2.D20 U$2.E20 U$2.F3 U$2.F20 U$2.G3 U$2.G20 U$2.H4 U$2.H19 U$2.K2 U$2.K21 U$2.N2 U$2.N21 U$2.R4 U$2.R19 U$2.R20 U$2.T4 U$2.U3 U$2.U20 U$2.U21 U$2.V1 U$2.V21 U$2.V22 U$2.Y6 U$2.Y16 U$2.Y17
VDDA: U2.33
VREF+: U2.32
VSS: U2.16 U2.38 U2.51 U2.61 U2.83 U2.94 U2.107 U2.120 U2.130
VSSA: U2.31

## Tracks (layer width: path | path; a pad name or v marks a point on that pad's centre or on a via)
5V_EXT  (10 unrouted)
CLK  (1 unrouted)
DB7  (1 unrouted)
GND  (164 unrouted)
GPIO8  (1 unrouted)
GPIO9  (1 unrouted)
GPIO10  (1 unrouted)
GPIO12  (1 unrouted)
GPIO20  (1 unrouted)
GPIO21  (1 unrouted)
GPIO22  (1 unrouted)
N$1  (1 unrouted)
N$2  (1 unrouted)
N$3  (1 unrouted)
N$4  (1 unrouted)
N$5  (1 unrouted)
N$6  (1 unrouted)
N$7  (2 unrouted)
N$8  (1 unrouted)
N$9  (1 unrouted)
N$10  (2 unrouted)
N$11  (2 unrouted)
N$12  (2 unrouted)
N$13  (1 unrouted)
N$14  (2 unrouted)
N$15  (1 unrouted)
N$16  (1 unrouted)
N$17  (1 unrouted)
N$18  (1 unrouted)
N$19  (1 unrouted)
N$20  (1 unrouted)
N$21  (1 unrouted)
N$22  (2 unrouted)
N$30  (1 unrouted)
N$31  (1 unrouted)
N$32  (1 unrouted)
PG_CORE  (2 unrouted)
PG_IO  (1 unrouted)
S  (3 unrouted)
VCC33  (3 unrouted)
VCCA  (2 unrouted)
VCCB  (2 unrouted)
VDD  (11 unrouted)
VDD_CORE  (44 unrouted)
VDD_IO  (44 unrouted)
VSS  (8 unrouted)